# Altium PCB PCB.PcbDoc
Units mm, origin at the board's own origin, x right, y up, seen from the top; angles counter-clockwise.
Board outline 20.32 x 19.3 mm, 2 copper layers (Top Layer, Bottom Layer); 9 components, 7 nets, 28 pads, 0 vias.
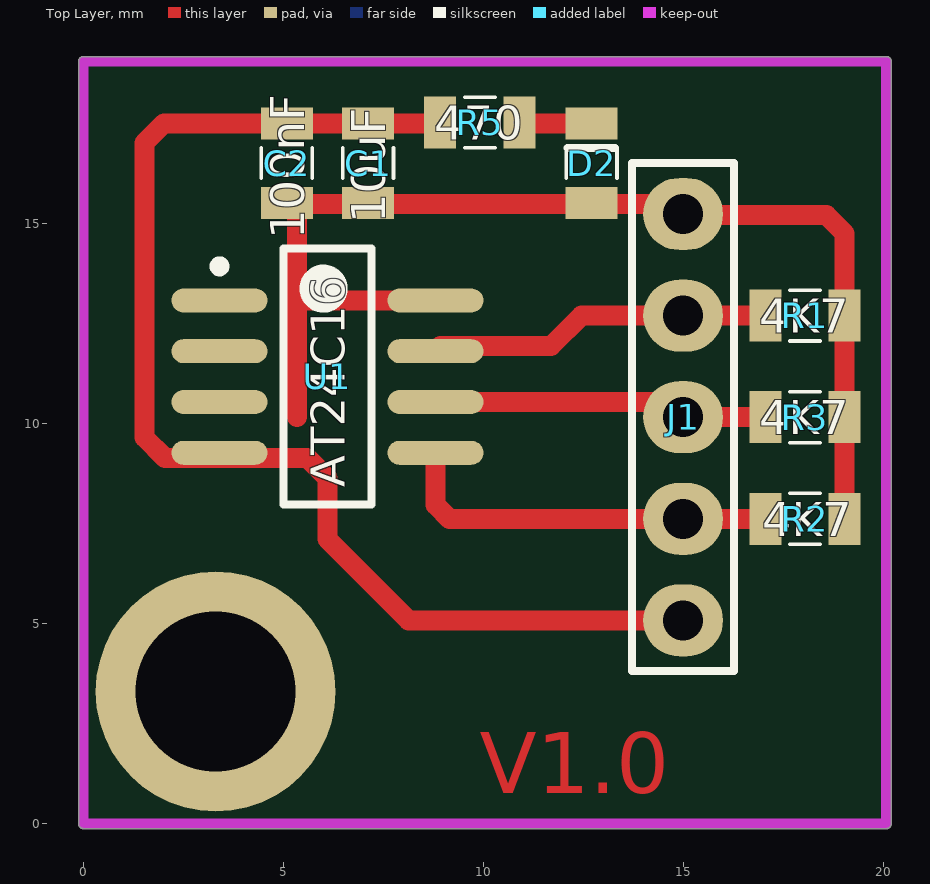
[diagram p0: Top Layer view]
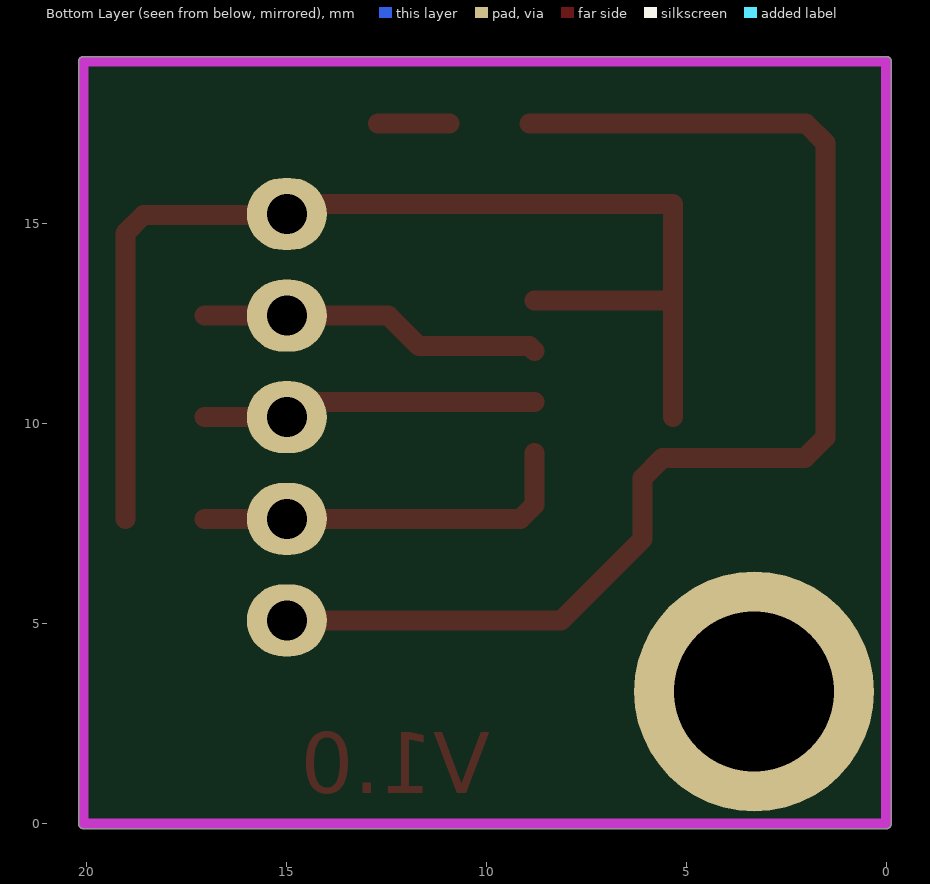
[diagram p1: Bottom Layer view, seen from below]

## Layer stack, top to bottom
Top Solder: solder mask 0.0102, Solder Resist, Dk 3.5
Top Layer: signal copper 0.0356
Dielectric 1: dielectric 0.32, FR-4, Dk 4.8
Bottom Layer: signal copper 0.0356
Bottom Solder: solder mask 0.0102, Solder Resist, Dk 3.5

## Board outline
0,-0.127 cw(c0,0) -0.127,0 -0.127,19.05 cw(c0,19.05) 0,19.177 20.066,19.177 cw(c20.066,19.05) 20.193,19.05 20.193,0 cw(c20.066,0) 20.066,-0.127

## Design rules (kind name [scope] priority, off if disabled: settings)
Clearance [All] p1: gap=0.3
PolygonConnect [All] p1: connectstyle=Relief reliefconductorwidth=0.254 reliefentries=4 polygonreliefangle="90 Angle" airgapwidth=0.254
RoomDefinition Main [InComponentClass('Main')] p1: confinementstyle=ConfineIn formatcopy=TRUE lockcomponents=FALSE outline -24.638,-36.83 26.162,-36.83 26.162,-11.43 -24.638,-11.43
RoutingVias [All] p1: holewidth=0.3 width=0.6 viastyle="Through Hole" minholewidth=0.3 minwidth=0.6 maxholewidth=0.3 maxwidth=0.6
SolderMaskExpansion [All] p1: expansion=0.102
Width [All] p1: maxlimit=0.5 minlimit=0.3 preferedwidth=0.3
30 further rules are at their usual default settings.

## Components (designator, comment, footprint, x,y, rotation, side; value= is the part's Value field where it differs from the comment)
C1 "10uF" 0805 7.112,16.51 r270 top
C2 "100nF" 0805 5.08,16.51 r270 top
D2 "GREEN" 0805_Diode 12.7,16.51 r90 top
J1 "5PIN" HDR1X5 14.986,5.08 r90 top
R1 "4K7" 0805 18.034,12.7 r0 top
R2 "4K7" 0805 18.034,7.62 r0 top
R3 "4K7" 0805 18.034,10.16 r0 top
R5 "470" 0805 9.906,17.526 r180 top
U1 "AT24C16" SOP127P636-8N 6.096,11.176 r0 top

## Footprints (in the part's own frame and the unit in brackets; to place one, negate y for a bottom-side part, rotate by r counter-clockwise, add the part's x,y. Pads: shape width x height; smd on the part's side, far side on the other; paste and mask are expansions set on the pad)
0805 [mm] "Chip Resistor, Body 2.0x1.3mm, IPC Medium Density"
  rect 0.8x1.3 smd: 1(-0.991,0) 2(0.991,0)
  silkscreen extent -0.38,-0.64 0.38,0.64, body extent -1.07,-0.7 1.07,0.7, height 0.65
0805_Diode [mm] "Chip Resistor, Body 2.0x1.3mm, IPC Medium Density"
  rect 0.8x1.3 smd: 1(-0.991,0) 2(0.991,0)
  silkscreen extent -0.38,-0.64 0.38,0.64, body extent -1.07,-0.7 1.07,0.7, height 0.65
HDR1X5 [mm]
  oval 1.8x2 hole 1: 1(0,0) 2(2.54,0) 3(5.08,0) 4(7.62,0) 5(10.16,0)
  silkscreen extent -1.27,-1.27 11.43,1.27
SOP127P636-8N [mm] "SOP, 8-Leads, Body 6x4.7mm, Pitch 1.27mm, IPC Medium Density"
  oval 2.4x0.6 smd: 1(-2.7,1.905) 2(-2.7,0.635) 3(-2.7,-0.635) 4(-2.7,-1.905) 5(2.7,-1.905) 6(2.7,-0.635) 7(2.7,0.635) 8(2.7,1.905)
  silkscreen extent -2.82,-3.2 1.1,3.2, body extent -2.36,-3.17 2.36,3.17, height 1.5

## Part data
C1 C2: library part Cap, "Capacitor"
D2: library part LED, "Typical INFRARED GaAs LED"
J1: library part "Header 5", "Header, 5-Pin"
R1 R2 R3 R5: library part Res1, "Resistor"
U1: library part AT24C01B-TP25-B, "1Kbit (128 x 8), 2-wire Bus Automotive Serial EEPROM with Write Protect, 2.5V, 8-Pin TSSOP, Bulk"

## Free pads (board coordinates)
  round 6 hole 4: 0(3.302,3.302)

## Nets (pads, with @x,y where several pads share a name; then routed paths per layer and width w, separated by ;. In a path a pad name is that pad's centre, name@x,y a point inside that pad or via, vN(x,y) a via of type N, cw(c..) or ccw(c..) an arc to the next point about the centre after c; other vN are vias at no path point)
+5V: C1.2 C2.2 D2.1 J1.5 R1.2 R2.2 R3.2 U1.8 | length 30
  Top Layer w0.5: 5.334,10.16 5.334,15.494 14.986,15.494 J1.5 15.011,15.215 18.567,15.215 19.025,14.757 R1.2 R3.2 R2.2 ; 5.461,13.081 U1.8
GND: C1.1 C2.1 J1.1 R5.2 U1.4 | length 31.2
  Top Layer w0.5: R5.2@8.915,17.501 2.007,17.501 1.524,17.018 1.524,9.652 2.032,9.144 5.588,9.144 6.096,8.636 6.096,7.112 8.128,5.08 J1.1
NetD1_1: 
NetD2_2: D2.2 R5.1 | length 1.8
  Top Layer w0.5: R5.1@10.922,17.501 D2.2
SCL: J1.3 R3.1 U1.6 | length 8.4
  Top Layer w0.5: U1.6 14.605,10.541 J1.3 R3.1
SDA: J1.2 R2.1 U1.5 | length 9.7
  Top Layer w0.5: U1.5 8.796,7.968 9.144,7.62 J1.2 R2.1
WP: J1.4 R1.1 U1.7 | length 8.6
  Top Layer w0.5: U1.7 8.923,11.938 11.684,11.938 12.446,12.7 J1.4 R1.1
pads on no net: U1.1 U1.2 U1.3

## Keep-outs
Keep-Out Layer:
  lines w0.254: 0,0 20.066,0 20.066,19.05 0,19.05 0,0

## Other copper
Top Layer:
  text "V1.0" at 9.906,0.762 h1.52

## Silkscreen, mask and mechanical layers (free items; w line width, h text height)
Mechanical 15:
  rectangle: 17.272,0.508 18.796,2.032
  rectangle: 17.272,-1.778 18.796,-0.254
  rectangle: 13.462,-1.778 14.986,-0.254
  rectangle: 13.208,0.762 14.732,2.286
  rectangle: 25.654,3.81 27.178,5.334
  rectangle: 30.226,1.27 31.75,2.794
  rectangle: 23.114,4.826 24.638,6.35
  rectangle: 28.194,4.572 29.718,6.096
  rectangle: 20.066,11.176 21.59,12.7
  rectangle: 23.114,8.382 24.638,9.906
  rectangle: 30.226,6.604 31.75,8.128
  rectangle: 27.94,8.636 29.464,10.16
  rectangle: 25.654,9.398 27.178,10.922
  rectangle: 30.226,11.938 31.75,13.462
  rectangle: 9.652,4.572 11.176,6.096
  rectangle: 5.842,4.572 7.366,6.096
  rectangle: 5.842,7.112 7.366,8.636
  rectangle: 9.652,7.112 11.176,8.636
  rectangle: 9.652,9.652 11.176,11.176
  rectangle: 5.842,9.652 7.366,11.176
  rectangle: 14.478,13.208 16.002,14.732
  rectangle: 3.556,13.208 5.08,14.732